# Allegro board AHC-20-003_Homekit_Light_Fan_Switch.brd
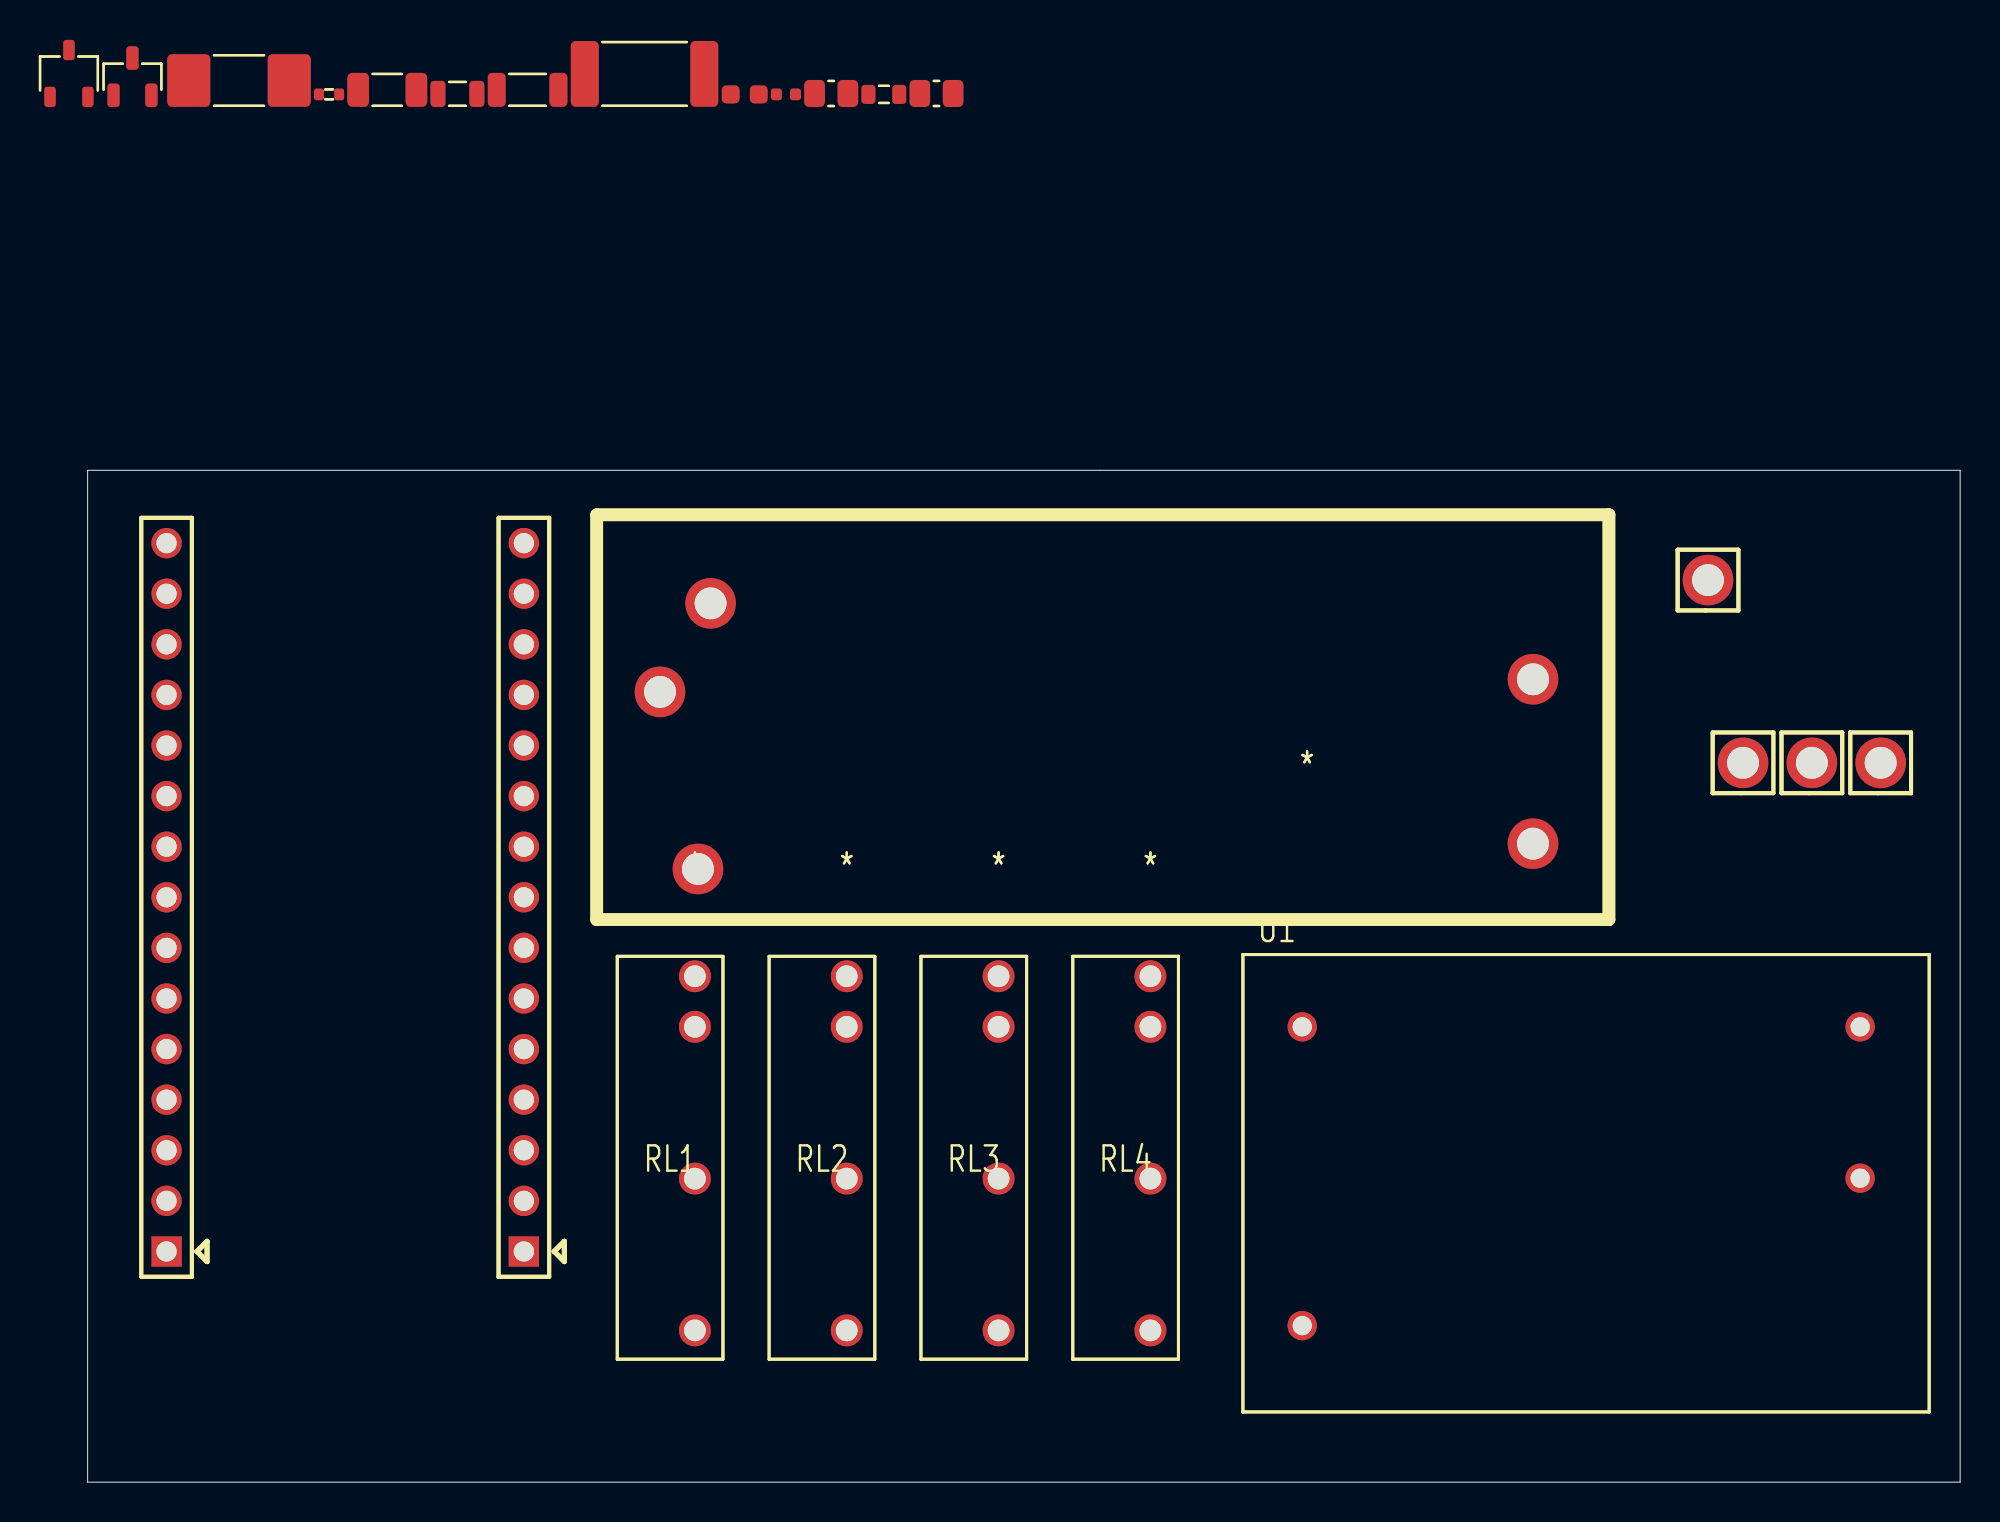
[diagram p0: board, top side]
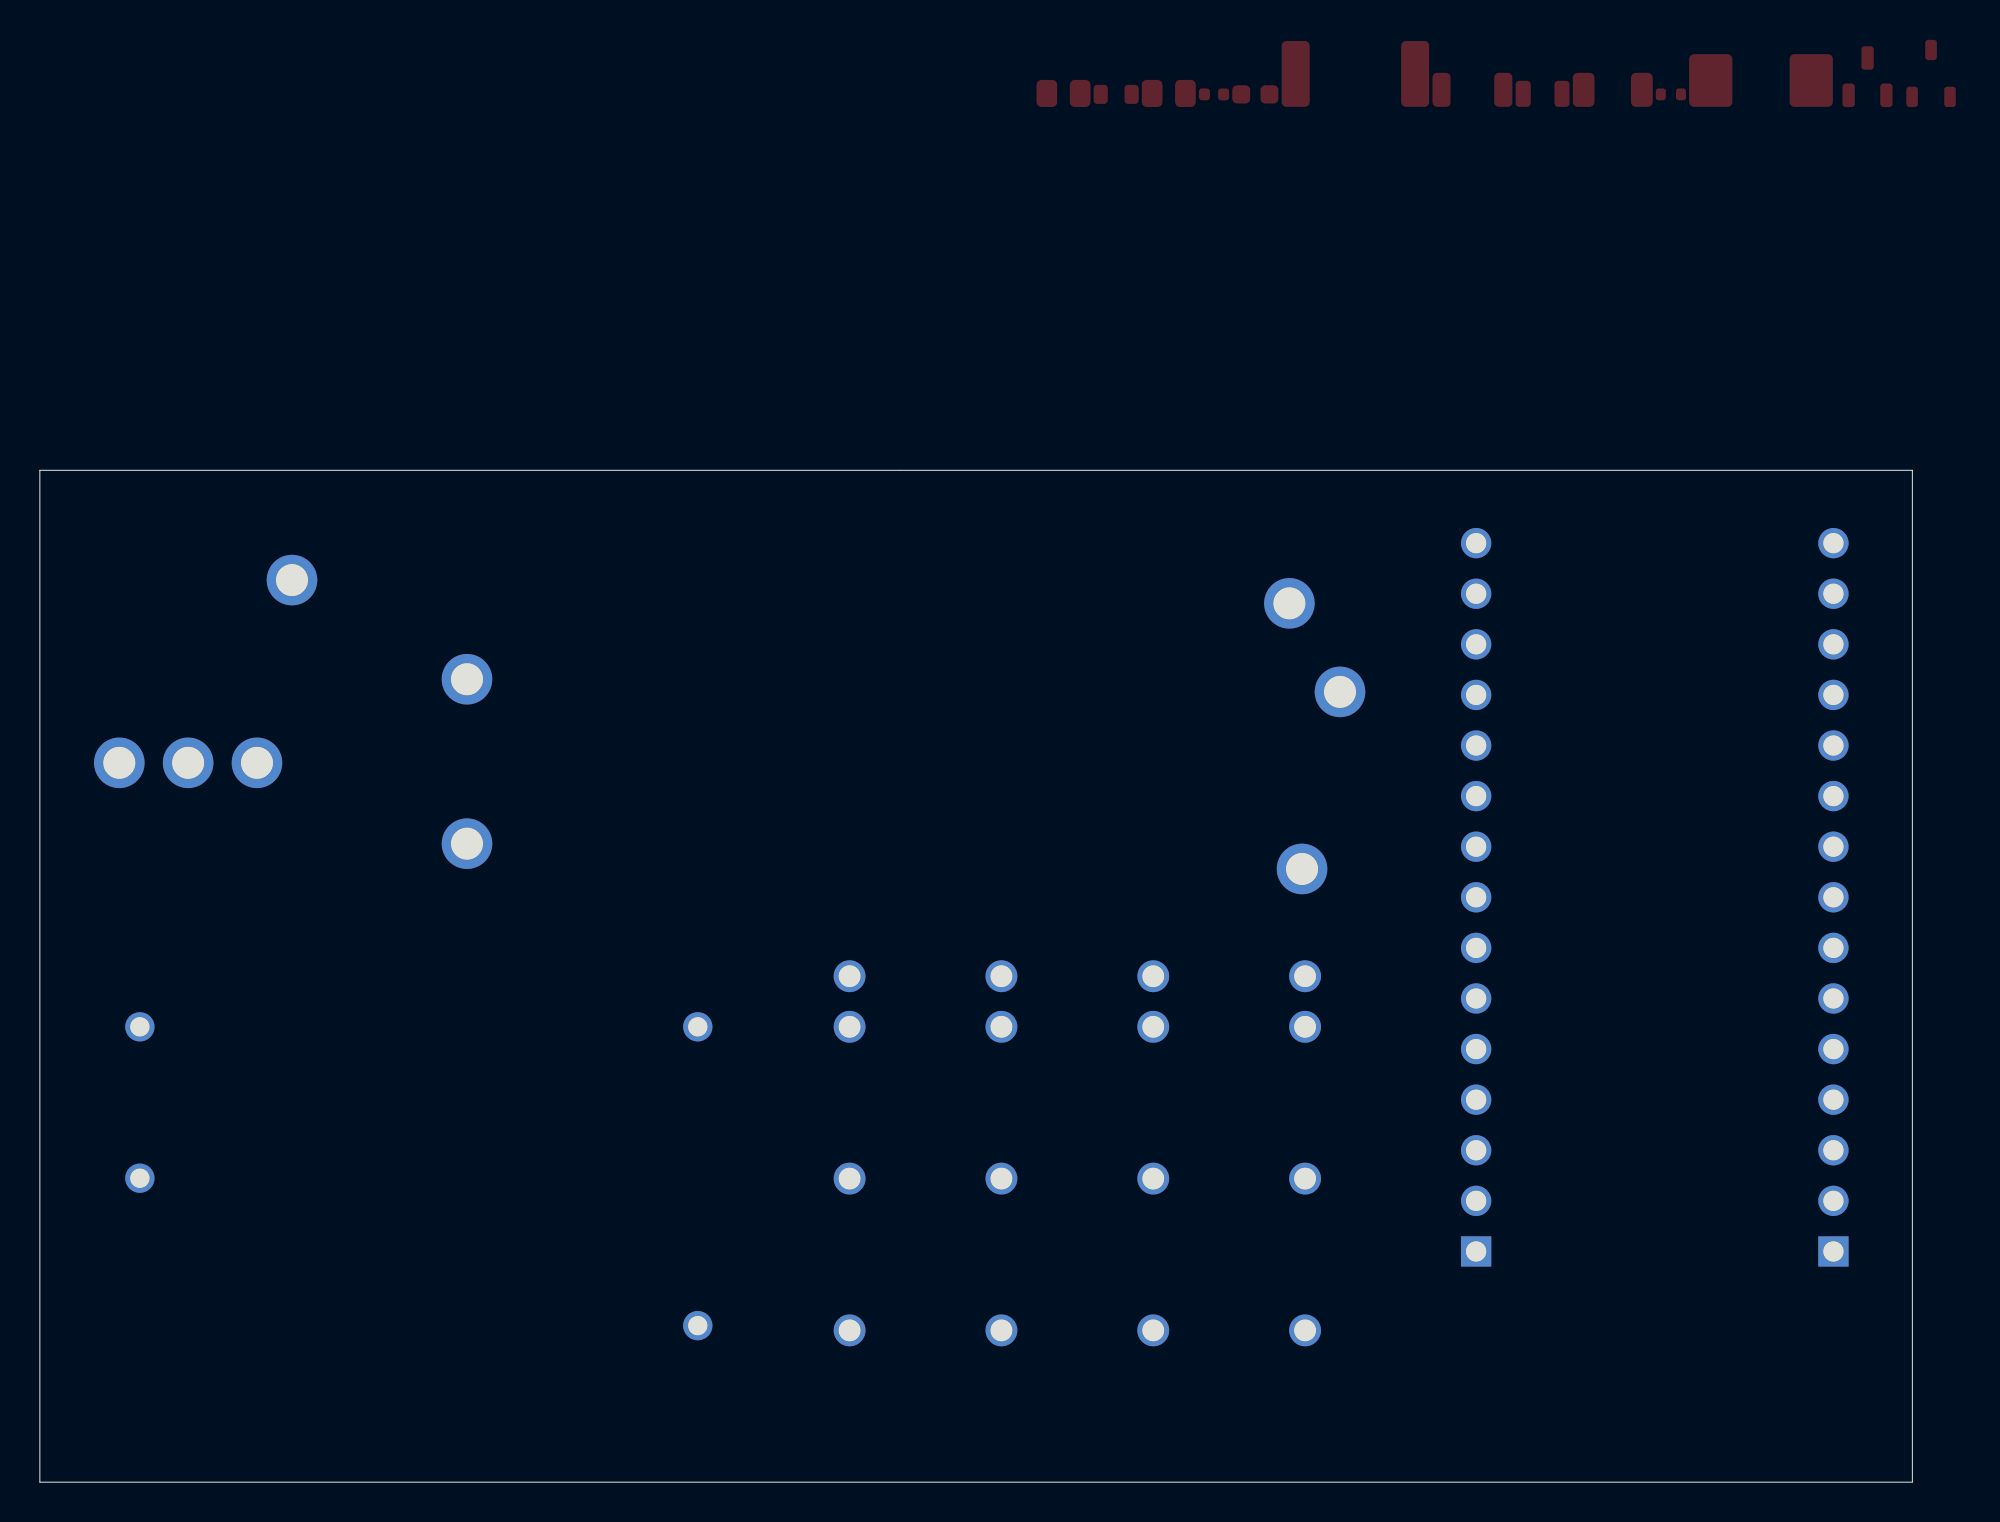
[diagram p1: board, bottom side, seen from below]

Outline 93.98 x 50.8 mm; copper layers: TOP, BOTTOM. Coordinates in mm from the lower left corner of the outline.
Outline path: 0,50.8 0,0 93.98,0 93.98,50.8 0,50.8

## Design rules (mm)
constraint set DEFAULT: min track width 0.152, pair gap 0.152

## Placement (name value [footprint] x y rotation side)
C1  ?  [CAPC200X125X125L50N]  42.6 69.72 0 top
C2  4uF, 4uF, 2.2uF  [CNCCANEN_CBB61]  76.35 28.24 0 top
C3  ?  [CAPC100X50X50L25N]  35.05 69.67 0 top
C4  ?  [CAPC160X80X80L40N]  32.98 69.67 0 top
C5  ?  [CAPC200X125X125L50N]  37.32 69.72 0 top
C6  ?  [CAPC320X160X160L50N]  15.04 69.9 0 top
F1  10A  [FUSC610X254X254L150N]  7.6 70.37 0 top
J1  613 015 111 21  [JTHI_HDR1R15PS_100MIL]  21.89 11.58 0 top
J2  613 015 111 21  [JTHI_HDR1R15PS_100MIL]  3.96 11.58 0 top
NOREF  -  []  -50.8 -127 0 top
Q1  2N7002L  [SOT23-3P95_237X111L42X43N]  2.25 70.56 0 top
Q2  CPH3351  [SOT23-3P95_280X100L40X40N]  -0.94 70.72 0 top
R1  ?  [RESC100X50X35L20N]  12.12 69.67 0 top
R2  ?  [RESC155X85X45L30N]  39.96 69.67 0 top
R3  ?  [RESC200X120X45L35N]  18.56 69.7 0 top
R4  ?  [RESC320X160X55L45N]  22.08 69.9 0 top
R5  ?  [RESC630X320X60L80N]  27.95 70.7 0 top
RL1  G6DN-1A DC5  [OMRON_G6DN-1A_DC5]  30.48 25.4 0 top
RL2  G6DN-1A DC5  [OMRON_G6DN-1A_DC5]  38.1 25.4 0 top
RL3  G6DN-1A DC5  [OMRON_G6DN-1A_DC5]  45.72 25.4 0 top
RL4  G6DN-1A DC5  [OMRON_G6DN-1A_DC5]  53.34 25.4 0 top
TP1  5007  [KEYSTONE_5007]  89.99 36.11 0 top
TP2  5007  [KEYSTONE_5007]  81.33 45.29 0 top
TP3  5007  [KEYSTONE_5007]  83.08 36.11 0 top
TP4  5007  [KEYSTONE_5007]  86.54 36.11 0 top
U1  IRM-01-5  [MEANWELL_IRM-01-5]  60.96 22.86 0 top

## Library data of the parts
C1 C3-C6 = CAP_NP
C2 = CBB61
F1 = FUSE
J1 J2 = CON_15
Q1 = MOSFET_NPN
Q2 = MOSFET_PNP
R1-R5 = RESISTOR
RL1-RL4 = RELAY_SPST: User Part Number: PN; Tolerance: TOL
TP1-TP4 = TP_VALUE
U1 = MEANWELL_IRM-01-5

## Footprints (pads in the part's own frame, mm; a bottom-side part is the same pattern mirrored in y, then rotated)
CAPC100X50X50L25N
  rrect 0.551x0.589 smd: 1(-0.48,0) 2(0.48,0)
CAPC160X80X80L40N
  rrect 0.899x0.909 smd: 1(-0.706,0) 2(0.706,0)
CAPC200X125X125L50N
  rrect 1.039x1.359 smd: 1(-0.836,0) 2(0.836,0)
CAPC320X160X160L50N
  rrect 1.09x1.709 smd: 1(-1.46,0) 2(1.46,0)
CNCCANEN_CBB61
  round 2.54 hole 1.6: 1(-3.81,12.065) 2(-3.81,3.81) 3(-45.72,2.54) 4(-47.625,11.43) 5(-45.085,15.875)
FUSC610X254X254L150N
  rrect 2.169x2.649 smd: 1(-2.52,0) 2(2.52,0)
JTHI_HDR1R15PS_100MIL
  rect 1.524x1.524 hole 1.016: 1(0,0)
  round 1.524 hole 1.016: 2(0,2.54) 3(0,5.08) 4(0,7.62) 5(0,10.16) 6(0,12.7) 7(0,15.24) 8(0,17.78) 9(0,20.32) 10(0,22.86) 11(0,25.4) 12(0,27.94) 13(0,30.48) 14(0,33.02) 15(0,35.56)
KEYSTONE_5007
  round 2.54 hole 1.6: 1(0,0)
MEANWELL_IRM-01-5
  round 1.473 hole 0.965: 1(0,0) 2(0,-15.001) 3(28.001,-7.6) 4(28.001,0)
OMRON_G6DN-1A_DC5
  round 1.6 hole 1.092: 1(0,0) 2(0,-2.54) 3(0,-10.16) 4(0,-17.78)
RESC100X50X35L20N
  rrect 0.5x0.589 smd: 1(-0.505,0) 2(0.505,0)
RESC155X85X45L30N
  rrect 0.711x0.96 smd: 1(-0.775,0) 2(0.775,0)
RESC200X120X45L35N
  rrect 0.759x1.311 smd: 1(-0.975,0) 2(0.975,0)
RESC320X160X55L45N
  rrect 0.909x1.709 smd: 1(-1.549,0) 2(1.549,0)
RESC630X320X60L80N
  rrect 1.41x3.31 smd: 1(-3,0) 2(3,0)
SOT23-3P95_237X111L42X43N
  rrect 0.62x1.181 smd: 1(-0.95,-0.935) 2(0.95,-0.935) 3(0,0.935)
SOT23-3P95_280X100L40X40N
  rrect 0.579x1.021 smd: 1(-0.95,-1.176) 2(0.95,-1.176) 3(0,1.176)

## Nets
3V3: J1.11 J2.6 J2.15
5V0: C1.1 J1.15 U1.3
GND_POWER: C1.2 J1.10 J1.14 J2.7 J2.14 U1.4
GND_SIGNAL: TP1.1 U1.1(N)
A0: J1.1
EN: J1.12
GPIO0: J2.4
GPIO1: J2.13
GPIO2: J2.5
GPIO3: J2.12
GPIO4: J2.3
GPIO5: J2.2
GPIO9: J1.5
GPIO10: J1.4
GPIO12: J2.9
GPIO13: J2.10
GPIO14: J2.8
GPIO15: J2.11
GPIO16: J2.1
L: TP2.1 U1.2
RST: J1.13
RSVD1: J1.2
RSVD2: J1.3
SDCLK: J1.9
SDCMD: J1.7
SDD0: J1.8
SDD1: J1.6
N00977: C2.3 C2.4 RL3.4
N01037: RL1.3(NO) RL2.3(NO) RL3.3(NO) TP3.1
N01089: C2.5(R) RL2.4
N01197: RL4.3(NO) TP4.1
N01204: C2.1 C2.2 F1.2 RL1.4 RL4.4
N03493: F1.1

Pads without a net: C3 1 2; C4 1 2; C5 1 2; C6 1 2; Q1 1 2 3; Q2 1 2 3; R1 1 2; R2 1 2; R3 1 2; R4 1 2; R5 1 2; RL1 1 2; RL2 1 2; RL3 1 2; RL4 1 2
